# Altium PCB HV_Boost.PcbDoc
Units mil, origin at the board's own origin, x right, y up, seen from the top; angles counter-clockwise.
Board outline 6299.21 x 1771.65 mil, 2 copper layers (Power, GND), stack 21 mil thick; 29 components, 17 nets, 88 pads, 63 vias.
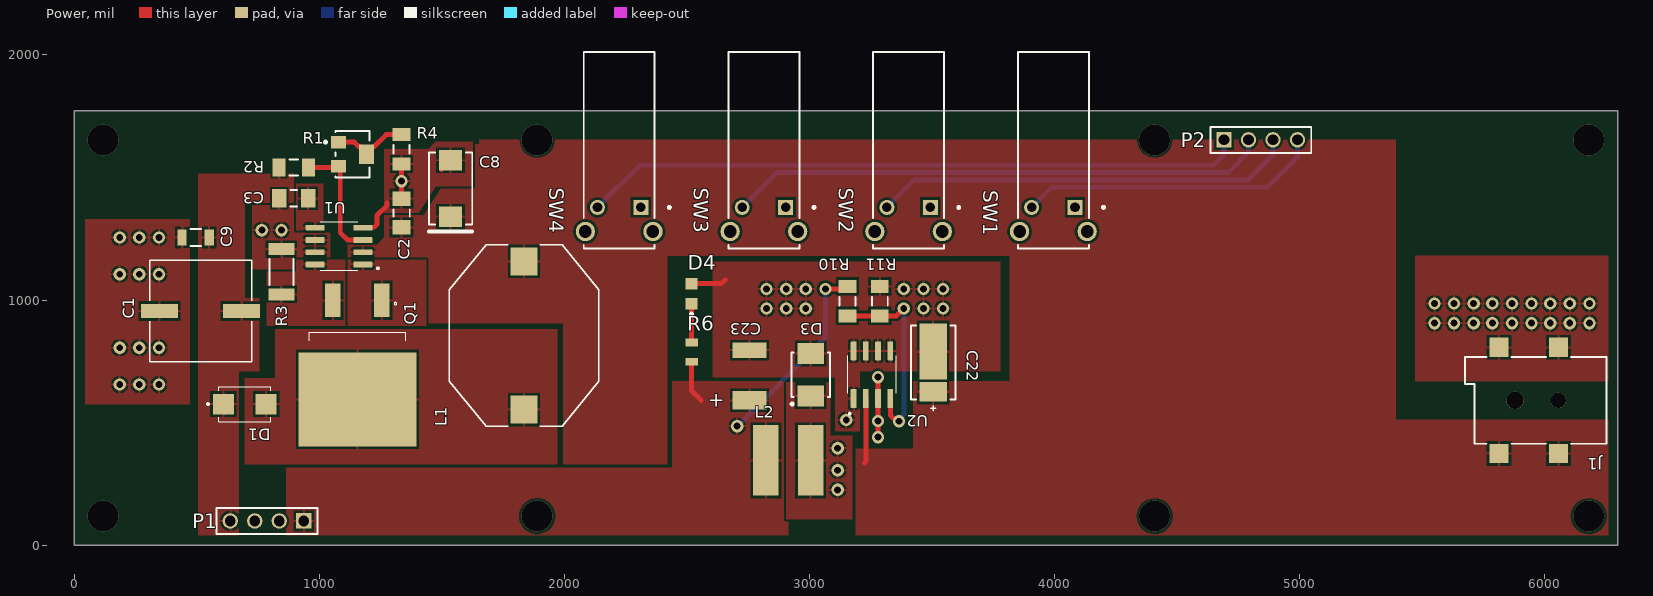
[diagram p0: Power view]
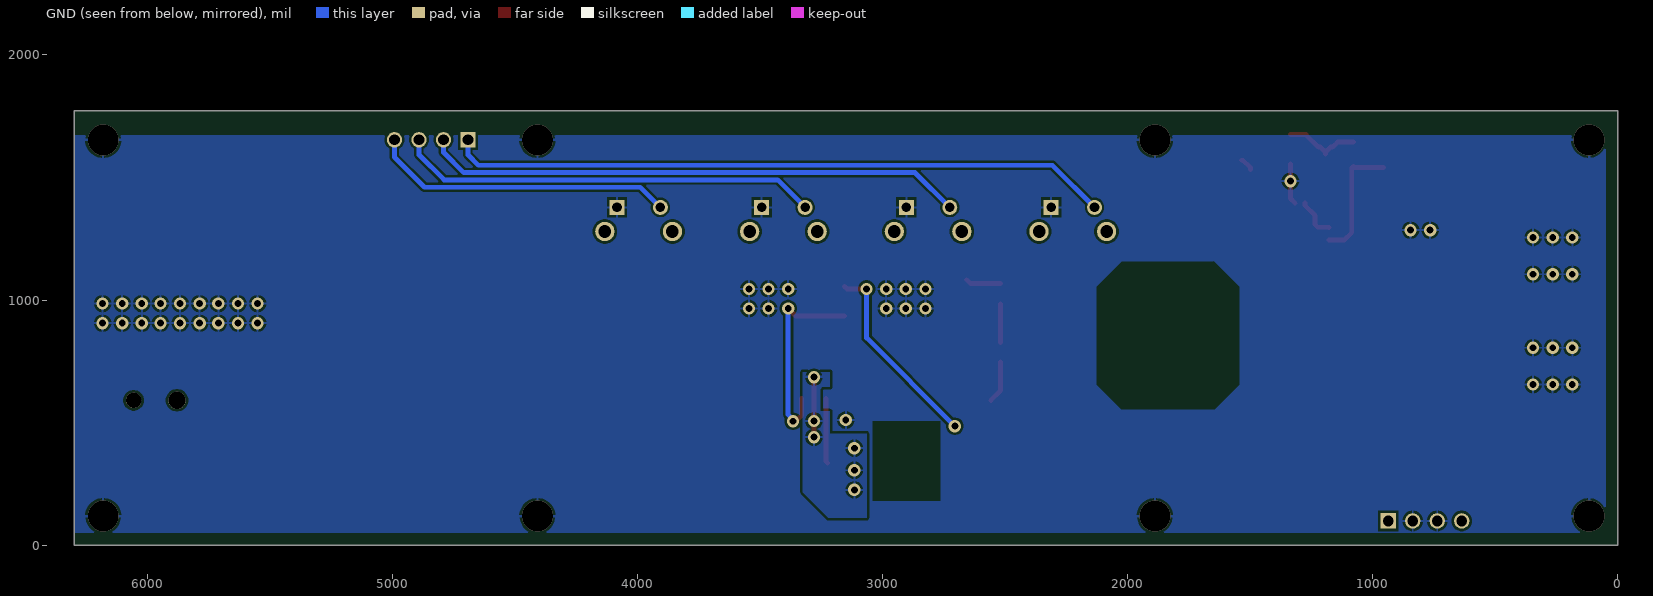
[diagram p1: GND view, seen from below]
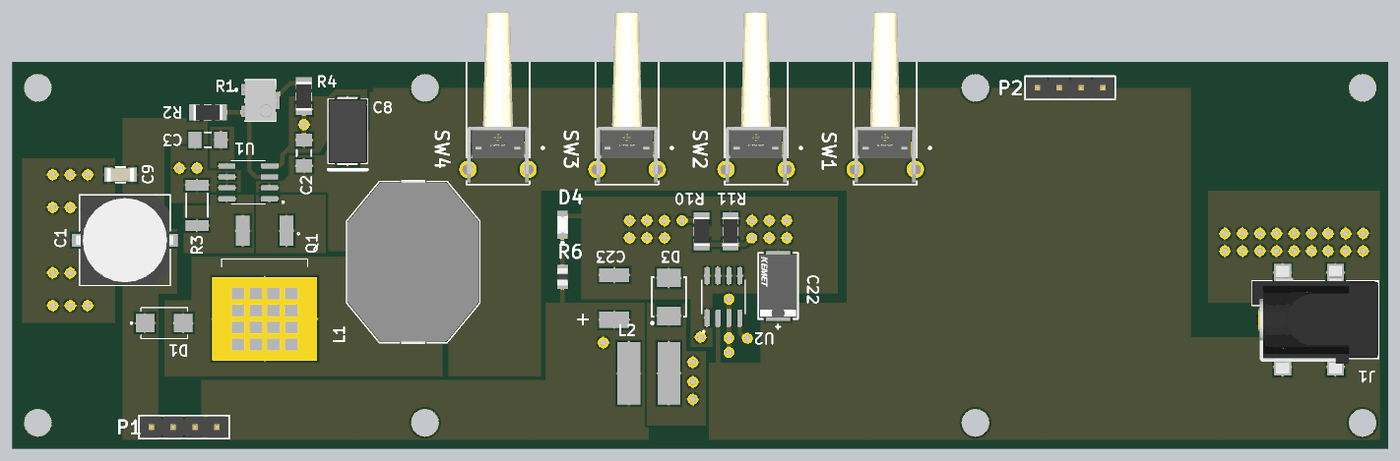
[diagram p2: 3D render of the assembled board from above, using the file's embedded part models]

## Layer stack, top to bottom
Top Solder: solder mask 0.4, Solder Resist, Dk 3.5
Power: signal copper 1.4
Dielectric 2: prepreg 2.8, PP-006, Dk 4.1
Dielectric 1: dielectric 12.6, FR-4, Dk 4.8
Dielectric 3: prepreg 2.8, PP-006, Dk 4.1
GND: signal copper 1.4
Bottom Solder: solder mask 0.4, Solder Resist, Dk 3.5

## Board outline
0,0 6299.21,0 6299.21,1771.65 0,1771.65

## Design rules (kind name [scope] priority, off if disabled: settings)
Clearance [All] p1: gap=10 ignorepadtopadclearanceinfootprint=FALSE except(0: Arc-Hole Track-Hole SMDPad-Hole THPad-Hole Via-Hole Fill-Hole Poly-Hole Region-Hole Text-Hole; 5: Arc-Arc Arc-Track Track-Track SMDPad-SMDPad; 7.87: Arc-SMDPad Arc-THPad Track-SMDPad Track-THPad; 19.68: THPad-THPad)
Height [All] p1: minheight=0 maxheight=1968.5 prefheight=500
HoleSize [All] p1: absolutevalues=TRUE maxlimit=248.03 minlimit=7.87 maxpercent=80.000 minpercent=20.000
PolygonConnect [All] p1: connectstyle=Relief reliefconductorwidth=10 reliefentries=4 polygonreliefangle="90 Angle" airgapwidth=10
RoutingVias [All] p1: holewidth=28 width=50 viastyle="Through Hole" minholewidth=28 minwidth=50 maxholewidth=28 maxwidth=50
SolderMaskExpansion [All] p1: expansion=1.97 istentingtop=FALSE
Width [All] p1: maxlimit=100 minlimit=10 preferedwidth=10
28 further rules are at their usual default settings.

## Classes and differential pairs
component class Buttons: SW1 SW2 SW3 SW4
component class MAX1771: C1 C2 C3 C8 C9 D1 L1 Q1 R1 R2 R3 R4 U1
component class MIC4690YM-TR: C22 C23 D3 D4 L2 L8 R6 R10 R11 U2
component class Connectors: J1 P1 P2

## Components (designator, comment, footprint, x,y, rotation, side; value= is the part's Value field where it differs from the comment)
C1 "EEV-EB2E100Q" CAP_UCD_10X10 516.22,955.12 r180 top
C2 "12065C104KAT2A" CAPC3216X94X50ML20T25 1336.22,1355.12 r90 top
C3 "12065C104KAT2A" CAPC3216X94X50ML20T25 896.22,1415.12 r180 top
C8 "TPSD107K010R0100" AVX-7343-31_L 1536.22,1455.12 r90 top
C9 "C1206C104KARACTU" FP-C1206C-EB-MFG 496.22,1255.12 r180 top value="0.10 μF"
C22 "47uF" FP-T528Z477M2R5ATE008-MFG 3505.91,745.28 r270 top
C23 "595D107X06R3C2T" 595D107X06R3C2T 2755.91,795.28 r180 top
D1 "ES2F" "DIOM5436X244N - duplicate" 696.22,575.12 r0 top
D3 "SS22T3G" ONSC-SMB-2-403A-03_V 3005.91,695.28 r90 top
D4 "LGR971-KN-1" FOOTPRINT-OSRAM-CHIPLED-0805-1A2K 2519.69,1025.59 r90 top
J1 "694106106102" 694106106102 5984.25,590.55 r90 top
L1 "B82479A1104M000" IND_EPCOS_B82479A1 1836.22,855.12 r90 top
L2 "CDRH6D38NP-180NC" CDRH6D38NP-180NC 3005.91,345.28 r180 top
P1 "61300411121" 61300411121 787.4,98.43 r180 top
P2 "61300411121" 61300411121 4842.52,1653.54 r0 top locked
Q1 "IRF740 D2PAK" D2PAK 1156.22,735.12 r270 top
R1 "3214W-1-502E" BOUR-3214W_V 1136.22,1595.12 r0 top
R2 "Resistor 1.5M +/-1% 1206 250 mW" RESC3216X60X45ML15T20 896.22,1541.27 r180 top value=1.5M
R3 "0.05 1% 2010(5025)" RESC2010(5025)_N 846.22,1115.12 r90 top value="100.00 Ohm"
R4 "Resistor 10k +/-1% 1206 250 mW" RESC3216X60X45ML15T20 1336.22,1615.12 r90 top value=10k
R6 "RMCF0805FT1K20" FOOTPRINT-0805-GEN 2519.69,787.4 r270 top value=1.2k
R10 "Resistor 3.01k +/-1% 1206 250 mW" RESC3216X60X45ML15T20 3155.91,995.28 r90 top value=3.01k
R11 "Resistor 976 +/-1% 1206 250 mW" RESC3216X60X45ML15T20 3287.84,995.28 r270 top value=976
SW1 "TL1105QF160Q" FP-TL1105QF160Q-MFG 3996.06,1611.22 r180 top
SW2 "TL1105QF160Q" FP-TL1105QF160Q-MFG 3405.51,1611.22 r180 top
SW3 "TL1105QF160Q" FP-TL1105QF160Q-MFG 2814.96,1611.22 r180 top
SW4 "TL1105QF160Q" FP-TL1105QF160Q-MFG 2224.41,1611.22 r180 top
U1 "MAX1771" 8-SOIC 1081.22,1220.12 r180 top
U2 "MIC4690YM-TR" TPS5402 3255.91,695.28 r90 top

## Footprints (in the part's own frame and the unit in brackets; to place one, negate y for a bottom-side part, rotate by r counter-clockwise, add the part's x,y. Pads: shape width x height; smd on the part's side, far side on the other; paste and mask are expansions set on the pad)
8-SOIC [mm]
  rrect25% 1.97x0.6 smd: 1(-2.47,1.905) 2(-2.47,0.635) 3(-2.47,-0.635) 4(-2.47,-1.905) 5(2.47,-1.905) 6(2.47,-0.635) 7(2.47,0.635) 8(2.47,1.905)
  silkscreen extent -4.14,-2.52 1.95,2.52
595D107X06R3C2T [mm]
  rect 3.5x1.9 smd: 1(0,5.2)
  rect 3.5x1.6 smd: 2(0,0)
  body extent -1.73,-0.79 1.73,6.12, height 3
61300411121 [mm] "Pin Header, pitch 2.54 mm, THT, Vertical, single row, 4p"
  rect 1.6x1.6 hole 1.1: 1(-3.81,0)
  round 1.6 hole 1.1: 2(-1.27,0) 3(1.27,0) 4(3.81,0)
  silkscreen extent -5.23,-1.35 5.23,1.35, body extent -5.08,-1.27 5.08,1.27, height 8.57
694106106102 [mm] "DC Power Jack Right Angled SMT ?6.4 with 4 soldering pads & pegs"
  rect 2x2 smd: 1(-5.5,-1.85) 1(-5.5,4.3) 2(5.5,-1.85) 3(5.5,4.3)
  round 1.6 hole 1.6 unplated: MH1(0,-1.85)
  round 1.8 hole 1.8 unplated: MH2(0,2.65)
  silkscreen extent -4.5,-6.85 4.5,7.85, body extent -6.25,-6.85 6.25,7.85, height 11.05
AVX-7343-31_L [mm] "Molded Capacitor, 2-Leads, Body 7.5x4.5mm, IPC High Density"
  rect 2.1x2.4 smd: 1(-2.925,0) 2(2.925,0)
  silkscreen extent -4.47,-2.25 3.75,2.25, body extent -3.97,-2.25 3.97,2.25, height 3.1
BOUR-3214W_V [mm] "SMD, 3-Leads, Body 3.5x4.8mm, Pitch 1.25mm"
  rect 1.6x1.3 smd paste+0: 1(-1.45,1.25) 3(-1.45,-1.25)
  rect 1.6x2 smd paste+0: 2(1.45,0)
  silkscreen extent -2.92,-2.4 1.75,2.4, body extent -1.98,-2.41 1.98,2.41, height 5.28
CAP_UCD_10X10 [mil]
  rect 150x59 smd paste+0 mask+0: 1(-167.5,0) 2(167.5,0)
  silkscreen extent -208,-208 208,208, body extent -222,-203 222,203, height 415
CAPC3216X94X50ML20T25 [mm] "Chip Capacitor, 2-Leads, Body 3.20x1.60mm, IPC Low Density"
  rect 1.5x1.9 smd: 1(-1.5,0) 2(1.5,0)
  silkscreen extent -0.35,-0.85 0.35,0.85, body extent -1.7,-0.9 1.7,0.9, height 0.94
CDRH6D38NP-180NC [mm]
  rect 2.65x7.3 smd: 1(0,0) 2(4.65,0)
  body extent -1.3,-3.63 5.94,3.63, height 4
D2PAK [mm]
  rect 3.5x1.6 smd: 1(-6.7,2.54) 3(-6.7,-2.54)
  rect 9.75x12.2 smd paste-7: 4(3.575,0)
  silkscreen extent -6.48,-5 -2.51,5
"DIOM5436X244N - duplicate" [mm]
  rect 2.18x2.12 smd: 1(-2.215,0) 2(2.215,0)
  silkscreen extent -3.9,-1.81 2.7,1.81
FOOTPRINT-0805-GEN [mm] "1/8 Watt"
  rect 0.8x1.3 smd: 1(-1,0) 2(1,0)
  body extent -1,-0.6 1,0.6, height 0.71
FOOTPRINT-OSRAM-CHIPLED-0805-1A2K [mm] "Rectangle with Flat Top 1.30mm x 1.25mm"
  rect 1.2x1.2 smd: 1(-1.05,0) 2(1.05,0)
  silkscreen extent -2.1,0 -2.1,0, body extent -1.01,-0.62 0.99,0.63, height 0.8
FP-C1206C-EB-MFG [mm]
  rect 0.95x1.7 smd paste+0 mask+0: 1(-1.4,0) 2(1.4,0)
  silkscreen extent -0.55,-0.9 0.55,0.9, body extent -2,-1 2,1, height 0.25
FP-T528Z477M2R5ATE008-MFG [mm]
  rect 5.82x2.82 smd paste+0 mask+0: 1(-1.15,0)
  rect 2.02x2.82 smd paste+0 mask+0: 2(3.05,0)
  silkscreen extent -3.85,-2.3 5,2.3, body extent -4.18,-2.42 4.18,2.42, height 0.25
FP-TL1105QF160Q-MFG [mm]
  rect 1.55x1.55 hole 1 paste-1000 mask+0: 1(-2.25,5.925)
  round 1.55 hole 1 paste-1000 mask+0: 2(2.25,5.925)
  round 2 hole 1.3 paste-1000 mask+0: 3(-3.5,8.425) 4(3.5,8.425)
  silkscreen extent -5.33,-10.18 3.67,10.18, body extent -4.6,-10.28 4.6,10.28, height 0.25
IND_EPCOS_B82479A1 [mil]
  rect 115x110 smd paste+0 mask+0: 1(-302.5,0) 2(302.5,0)
  silkscreen extent -370,-305 370,305, body extent -377,-300 377,300, height 292
ONSC-SMB-2-403A-03_V [mil] "Molded, 2-Leads, Body 4.6x3.95mm"
  rect 85x107.99 smd: 1(-87.01,0) 2(87.01,0)
  silkscreen extent -125,-79 91,81, body extent -91,-78 91,78, height 97
RESC2010(5025)_N [mm] "Chip Resistor, Body 5.0x2.5mm, IPC Medium Density"
  rect 1.25x2.7 smd: 1(-2.35,0) 2(2.35,0)
  silkscreen extent -1.35,-1.25 1.35,1.25, body extent -2.6,-1.35 2.6,1.35, height 0.71
RESC3216X60X45ML15T20 [mm] "Chip Resistor, 2-Leads, Body 3.3x1.75mm, IPC Low Density"
  rect 1.35x1.85 smd: 1(-1.525,0) 2(1.525,0)
  silkscreen extent -0.45,-0.82 0.45,0.82, body extent -1.65,-0.87 1.65,0.87, height 0.6
TPS5402 [mm]
  rrect25% 1.97x0.6 smd: 1(-2.47,1.905) 2(-2.47,0.635) 3(-2.47,-0.635) 4(-2.47,-1.905) 5(2.47,-1.905) 6(2.47,-0.635) 7(2.47,0.635) 8(2.47,1.905)
  silkscreen extent -4.14,-2.52 1.95,2.52

## Part data
C1: library part UUB2E4R7MNL1GS, Built_By=EMA_Cory, Copyright="Copyright (C) 2018 Accelerated Designs. All rights reserved", Manufacturer_Part_Number=UUB2E4R7MNL1GS, RefDes=RefDes, SourceLibrary=Nichicon_2019-09-13, Type=DEV, Vendor=Nichicon
C2 C3: library part CMP-2000-05018-1, "Chip Capacitor, Ceramic, 100 nF, 10%, 50 V, 1206, RoHS, Tape and Reel / 12065C104KAT2A", Capacitance=100nF, Case Size/Dimension=1206, Dielectric=X7R, Manufacturer=AVX, Rated Voltage=50V, Tolerance (%)=±10%, Datasheet URL=http://www.mouser.com/ds/2/40/cauto-360.pdf, Datasheet Version=Sep-14, Manufacturer URL=http://www.avx.com/
C8: library part CMP-2000-07298-1, "Tantalum Capacitor, 100 uF, +/- 10%, 10 V, -55 to 125 degC, 2917 (7343 Metric), RoHS, Tape and Reel / TPSD107K010R0100", Capacitance=100µF, ESR (Equivalent Series Resistance)=100mOhm, Lifetime @ Temp.=-, Manufacturer=AVX, Manufacturer Size Code=D, Operating Temperature=-55°C~125°C, Package / Case=2917(7343Metric), Package Description="2-Pin Surface Mount Device, Body 7.3 x 4.35 mm", Package Reference=7343-31, Standard Package=1, Tolerance=±10%, Voltage - Rated=10V, Catalog Drawings=TPSSeriesSides, Category=Capacitors, Datasheet URL=http://datasheets.avx.com/TPS.pdf, Datasheet Version=01/2017, Family=TantalumCapacitors, Featured Product=TPSCapacitors, Features=GeneralPurpose, Height - Seated (Max)="0.122\"(3.10mm)", Lead Spacing=-, Manufacturer URL=http://www.avx.com/, Mounting Technology=SurfaceMount, Mounting Type=SurfaceMount, Online Catalog=TPSSeries, Other Names=478-1777-1, Packaging=CutTape(CT), Product Training Modules=ComponentSolutionsforSmartMeterApplications, Series=TPS, Size / Dimension="0.287\"Lx0.169\"W(7.30mmx4.30mm)", Type=Molded
C9: library part CMP-1037-04229-2, "CAP CER 0.1UF 250V X7R 1206 / C1206C104KARACTU", Capacitance="0.10 μF", Manufacturer=KEMET, Package=C1206C-EB, Temperature="-55°C to +150°C", Temperature Characteristic=X7R, Temperature Coefficient=15%, Temperature Range High=+150°C, Temperature Range Low=-55°C, Tolerance=0.1, Voltage Rating="250 V", Automotive=Yes, Automotive Grade="Grade 0", Category=Cap, ComponentLink2Description=Datasheet, ComponentLink2URL=https://content.kemet.com/datasheets/KEM_C1007_X8R_ULTRA_150C_SMD.pdf, Device Class L1="Passive Components", Device Class L2=Capacitors, Device Class L3="Ceramic Capacitors", Digikey Description="CAP CER 0.1UF 250V X7R 1206", Height=0.88mm, Ipc Land Pattern Name=CAPC320160X78, Lead Free=Yes, Manufacturer Part Number=C1206C104KARACTU, Material=Ceramic, Mouser Description="Multilayer Ceramic Capacitors MLCC - SMD/SMT 250volts 0.1uF X7R 10%", Octopart=https://octopart.com/c1206c104karactu-kemet-193627, RoHS=TRUE
C22: library part CMP-03017-000005-1, "CAP TANT 47UF 20% 20V 2917 / 595D476X0020D2T", Capacitance=470uF, Case Code (Imperial)=2917, Case Code (Metric)=7343, ESR (Equivalent Series Resistance)=8mR, Leakage Current=118uA, Max Operating Temperature=105°C, Min Operating Temperature=-55°C, Package Quantity=1, Ripple Current=6.4A, Tolerance=20%, Voltage Rating=2.5V, Case/Package=2917, Construction=Flat, Depth=4.3mm, Dissipation Factor=10%, Features="General Purpose", Height=1.7mm, Height - Seated (Max)=0.067inch, Length=7.3mm, Mount="Surface Mount", Packaging="Tape and Reel", Polarity=Polar, REACH SVHC="No SVHC", RoHS Compliant=Yes, Series="KO-CAP T528", Termination=SMD/SMT, Voltage Rating (DC)=2.5V, Width=0.169inch
C23: "595D107X06R3C2T / 100uF, 6.3V"
D1: library part ES2F_1
D3: library part CMP-1055-00373-1, "Schottky Power Rectifier, 2-Pin SMB, Pb-Free, Tape and Reel", Manufacturer="On Semiconductor", ComponentLink1Description="Manufacturer URL", ComponentLink1URL=http://www.onsemi.com/, ComponentLink2Description=Datasheet, ComponentLink2URL=http://www.onsemi.cn/pub_link/Collateral/SS24-D.PDF, ComponentLink3Description="Package Specification", ComponentLink3URL=http://www.onsemi.com/pub_link/Collateral/403A-03.PDF, Configuration=Single, DatasheetVersion="Rev. 4", IFSM Max (A)=75, Mounting Technology="Surface Mount", PackageDescription="2-Pin Small Molded Package, J-Bend Lead, Body 4.33 x 3.625 mm", PackageReference=SMB-2-403A-03, PackageVersion="Rev. J, 07/2012", Packing="Tape and Reel", PartNumber=SS22T3G, RoHS=TRUE
D4: library part CMP-017-000003-2, "LED Uni-Color Green 572nm 2-Pin Chip 0805(2012Metric) T/R", Current - Maximum=25mA, Current - Test=20mA, Forward Voltage=2.2V, Part Number=475-1410-1-ND, Design Item ID=LED-OSRAM-LG-R971-KN-1, Source=Discrete.SchLib
J1: library part CMP-1502-00177-1, "DC Power Jack Connector with 4 soldering pads & Pegs WR-DC, Male, Right Angled, SMT, 5 A, 24 V", Manufacturer="Wurth Elektronik", Operating Temperature=-40to85degC, Rated Current=5A, Working Voltage=24V, Datasheet URL=http://katalog.we-online.de/em/datasheet/6941xx106102.pdf, Gender=Male, Manufacturer URL=http://www.we-online.de, Mounting Technology=SMT, Opening Diameter=6.4mm, Orientation=RightAngled, Package Reference=694106106102, Packaging=TapeandReel, Part Number=694106106102, Plug Inner Diameter=2.05mm, Plug Outer Diameter=5.5mm, Publisher=WurthElektronik
L1: "No Description Available", Built_By=EMA_UL_Team, Copyright="Copyright (C) 2021 Accelerated Designs. All rights reserved", Manufacturer_Part_Number=B82479A1104M000, RefDes=RefDes, SourceLibrary=Epcos_2010-01-01_Inductors, Type=DEV, Vendor=Epcos
P1 P2: library part CMP-1502-01064-1, "THT Vertical Pin Header WR-PHD, Pitch 2.54 mm, Single Row, 4 pins", Contact Resistance=20mOhm, Manufacturer="Wurth Elektronik", Operating Temperature=-40to105degC, Rated Current=3A, Withstanding Voltage=500VAC, Working Voltage=250VAC, Datasheet URL=https://katalog.we-online.de/em/datasheet/6130xx11121.pdf, Gender=Male, Manufacturer URL=http://www.we-online.de, Mounting Technology=THT, Orientation=Vertical, Package Reference=61300411121, Packaging=Bag, Part Number=61300411121, Pin Number=4, Pitch=2.54mm, Publisher=WurthElektronik, Row Number=Single
R1: library part CMP-2000-05579-1, "3214 - 5-Turn Trimpot(R) Trimming Potentiometer, 5 KOhm, +/- 10%, 0.25 W, -65 to 150 degC, RoHS, Tape and Reel", Manufacturer=Bourns, Package Description="3-Pin Surface Mount Device, Body 3.5 x 4.8 mm, Pitch 1.25 mm", Package Reference=3214W, Power Rating=250mW, Resistance Tolerance=±10%, Temperature Coefficient=±100ppm/°C, Track Resistance=5kohm, Datasheet URL=http://www.bourns.com/docs/Product-Datasheets/3214.pdf, Datasheet Version=05/2016, Manufacturer URL=http://www.bourns.com/, Mounting Technology=SurfaceMount, No. of Turns=5, Potentiometer Mounting=SMD, RoHS Compliant=Yes, SVHC=NoSVHC(16-Jun-2014)
R2: library part CMP-009-00016-4, "Chip Resistor, 1.5M Ohm, +/- 1%, 0.25 W, -55 to 155 degC, 1206 (3216 Metric)", Case/Package=1206, Max Operating Temperature=155°C, Min Operating Temperature=-55°C, Power=250mW, Tolerance=1%, Voltage Rating=200V, Mounting Technology=SM, Pins=2, RoHS Compliant=True
R3: library part CMP-1017-00397-1, "0.05.75W 1% 2010 (5025 Metric)  SMD /  LR2010-R05FW", Case-EIA=2010, Case-Metric=5025, Power="0.75 W", Tolerance="1 %", Technology=SMT
R4: library part CMP-009-00016-4, "Chip Resistor, 10 KOhm, +/- 1%, 0.25 W, -55 to 155 degC, 1206 (3216 Metric)", Case/Package=1206, Max Operating Temperature=155°C, Min Operating Temperature=-55°C, Power=250mW, Tolerance=1%, Voltage Rating=200V, Mounting Technology=SM, Pins=2, RoHS Compliant=True
R6: library part CMP-009-00185-2, "Res Thick Film 0805 1.2K Ohm 1% 0.125W ±100ppm/°C Molded SMD Paper T/R", Design Item ID=Resistor-Generic-0805-2012, Source=Generic.SchLib, Type=Resistor
R10: library part CMP-009-00016-4, "Chip Resistor, 3.01KOhm, +/- 1%, 0.25 W, -55 to 155 degC, 1206 (3216 Metric)", Case/Package=1206, Max Operating Temperature=155°C, Min Operating Temperature=-55°C, Power=250mW, Tolerance=1%, Voltage Rating=200V, Mounting Technology=SM, Pins=2, RoHS Compliant=True
R11: library part CMP-009-00016-4, "Chip Resistor, 976Ohm, +/- 1%, 0.25 W, -55 to 155 degC, 1206 (3216 Metric)", Case/Package=1206, Max Operating Temperature=155°C, Min Operating Temperature=-55°C, Power=250mW, Tolerance=1%, Voltage Rating=200V, Mounting Technology=SM, Pins=2, RoHS Compliant=True
SW1 SW2 SW3 SW4: library part CMP-17879-000001-1, "SWITCH TACTILE SPST-NO 0.05A 12V", Contact Current Rating=50mA, Contact Resistance=100mΩ, Manufacturer=E-Switch, Operating Force=160gf, Voltage Rating Dc=12V, Automotive=No, Category=Switch, ComponentLink2Description=Datasheet, ComponentLink2URL=http://spec_sheets.e-switch.com/specs/P010022.pdf, Device Class L1=Electromechanical, Device Class L2=Switches, Device Class L3="Tactile Switches", Digikey Description="SWITCH TACTILE SPST-NO 0.05A 12V", Electromechanical Life=100000Cycles, Height=7.55mm, Lead Free=Yes, Manufacturer Part Number=TL1105QF160Q, Mount="Through Hole", Mouser Description="TL1105 Series SPST 1.6 N Round Button Right Angle Through Hole Tactile Switch", Octopart=https://octopart.com/tl1105qf160q-e-switch-1057556, Package=TL1105QF160Q, RoHS=TRUE, Throw Configuration=SPST

## Via types
v1: diameter 50, hole 28, Power to GND, 55 vias
v2: diameter 125.98, hole 125.89, Power to GND, 8 vias

## Nets (pads, with @x,y where several pads share a name; then routed paths per layer and width w, separated by ;. In a path a pad name is that pad's centre, name@x,y a point inside that pad or via, vN(x,y) a via of type N, cw(c..) or ccw(c..) an arc to the next point about the centre after c; other vN are vias at no path point)
+5V: C23.1 L2.2 P1.1 R6.2 R10.2 | length 977.1
  Power w20: R6.2 2519.69,629.92 2559.06,590.55 ; v1(3065.91,1045.28) 3145.87,1045.28 R10.2
  GND w20: v1(2705.91,485.28) 3065.91,845.28 v1(3065.91,1045.28)
+12V: C2.1 C8.1 C22.2 J1.1 L1.2 U1.2 U2.2 | length 264.8
  Power w20: 3225.91,335.28 3230.91,340.28 U2.2
GND: C1.2 C2.2 C3.2 C8.2 C9.2 C22.1 C23.2 D3.2 D4.2 J1.2 J1.3 P1.2 P1.3 R3.2 R4.1 R11.1 SW1.1 SW2.1 SW3.1 SW4.1 U1.4 U1.6 U1.7 U2.1 U2.5 U2.6 U2.7 U2.8 | length 534.9
  Power w20: U1.4 1180.23,1296.88 1224.5,1296.88 1236.22,1308.6 1236.22,1345.12 1276.22,1385.12 1276.22,1395.12 ; C2.2@1317.02,1394.97 C2.2 v1(1336.22,1485.12) R4.1 ; C8.2@1498.98,1533.03 1498.98,1538.94 1530.31,1570.28 C8.2 ; D4.2 2641.73,1066.93 2657.48,1082.68
  other v1: 3150.91,510.28 186.22,655.12 266.22,655.12 346.22,655.12 186.22,805.12 266.22,805.12 346.22,805.12 5551.18,905.51 5631.18,905.51 5711.18,905.51 5787.4,905.51 5867.4,905.51 5947.4,905.51 6023.62,905.51 6103.62,905.51 6183.62,905.51 2825.91,965.28 2905.91,965.28 2985.91,965.28 3465.91,965.28 3545.91,965.28 5551.18,985.51 5631.18,985.51 5711.18,985.51 5787.4,985.51 5867.4,985.51 5947.4,985.51 6023.62,985.51 6103.62,985.51 6183.62,985.51 2825.91,1045.28 2905.91,1045.28 2985.91,1045.28 3385.91,1045.28 3465.91,1045.28 3545.91,1045.28 186.22,1105.12 266.22,1105.12 346.22,1105.12 186.22,1255.12 266.22,1255.12 346.22,1255.12 766.22,1285.12 846.22,1285.12
  other v2: 118.11,118.11 1889.76,118.11 4409.45,118.11 6181.1,118.11 118.11,1653.54 1889.76,1653.54 4409.45,1653.54 6181.1,1653.54
HV+: C1.1 C9.1 D1.1 P1.4 R2.2
NetC3_1: C3.1 U1.5
NetD1_2: D1.2 L1.1 Q1.4
NetD3_1: D3.1 L2.1 U2.3 | length 245
  Power w20: v1(3280.91,440.28) v1(3280.91,506.44) v1(3280.91,685.28)
  other v1: 3115.91,225.28 3115.91,305.28 3115.91,395.28
NetD4_1: D4.1 R6.1 | length 157.5
  Power w20: R6.1 D4.1
NetP2_1: P2.1 SW4.2 | length 2706.6
  GND w20: SW4.2 2307.87,1550 4650,1550 4692.52,1592.52 P2.1
NetP2_2: P2.2 SW3.2 | length 2210.2
  GND w20: SW3.2 2868.43,1520 4710,1520 4792.52,1602.52 P2.2
NetP2_3: P2.3 SW2.2 | length 1725.5
  GND w20: SW2.2 3428.98,1490 4790,1490 4892.52,1592.52 P2.3
NetP2_4: P2.4 SW1.2 | length 1240.8
  GND w20: SW1.2 3989.53,1460 4870,1460 4992.52,1582.52 P2.4
NetQ1_1: Q1.1 U1.1
NetQ1_3: Q1.3 R3.1 U1.8
NetR1_1: R1.1 R1.2 R4.2 | length 312
  Power w20: R1.1 1144.09,1644.33 1163.94,1624.49 1171.81,1624.49 R1.2@1193.31,1602.99 ; R1.2 R1.2@1193.31,1602.99 ; R4.2 1273.35,1675.16 1222.68,1624.49 1214.8,1624.49 R1.2@1193.31,1602.99
NetR1_3: R1.3 R2.1 U1.3 | length 503.2
  Power w20: R2.1 1074.5,1541.27 R1.3 1086.22,1538.82 1086.22,1275.12 1116.22,1245.12 U1.3
NetR10_1: R10.1 R11.2 U2.4 | length 824.1
  Power w20: R10.1 R11.2 3355.87,935.24 v1(3385.91,965.28) ; U2.4 3330.91,529.87 3349.76,511.02 3360.17,511.02 v1(3365.91,505.28)
  GND w20: v1(3365.91,505.28) 3365.91,511.99 3385.91,531.99 v1(3385.91,965.28)
pads on no net: J1.MH1 J1.MH2 SW1.3 SW1.4 SW2.3 SW2.4 SW3.3 SW3.4 SW4.3 SW4.4

## Polygon pours and split planes (outlines as drawn)
+12V on Power "Power-+12V" (solid, pour order 58): 1116.22,1165.12 1446.22,1165.12 1446.22,905.12 1996.22,905.12 1996.22,330.12 2421.22,330.12 2421.22,1181.1 3818.9,1181.1 3818.9,669.29 3425.2,669.29 3425.2,393.7 3188.98,393.7 3188.98,39.37 6259.84,39.37 6259.84,511.81 5393.7,511.81 5393.7,1653.54 1653.54,1653.54 1653.54,1635.12 1636.22,1635.12 1636.22,1455.12 1496.22,1455.12 1426.22,1345.12 1266.22,1345.12 1266.22,1255.12 1236.22,1225.12 1116.22,1225.12
GND on Power "GND" (solid, pour order 56): 6259.84,669.29 6259.84,1181.1 5472.44,1181.1 5472.44,669.29
+5V on Power "GND" (solid, pour order 55): 866.14,39.37 2913.39,39.37 2913.39,669.29 2440.94,669.29 2440.94,314.96 866.14,314.96
GND on Power "Power-GND" (solid, pour order 46): 2605.91,1155.28 2605.91,685.28 3105.91,685.28 3105.91,465.28 3205.91,465.28 3205.91,710.28 3779.53,710.28 3779.53,855.28 3779.53,1155.28
NetD3_1 on Power "Power-NetD3_1" (solid, pour order 49): 3085.91,665.28 2905.91,665.28 2905.91,105.28 3175.91,105.28 3175.91,445.28 3085.91,445.28
NetD1_2 on Power "GND" (solid, pour order 31): 1971.22,880.12 1971.22,330.12 696.22,330.12 696.22,680.12 821.22,680.12 821.22,880.12
HV+ on Power "GND" (solid, pour order 32): 671.22,39.37 506.22,39.37 506.22,1276.69 506.22,1515.75 896.22,1515.75 896.22,1396.69 696.22,1396.69 696.22,1006.69 756.22,1006.69 756.22,708.66 671.22,708.66
GND on Power "GND" (solid, pour order 33): 471.22,1330.12 471.22,575.12 46.22,575.12 46.22,1330.12
NetQ1_3 on Power "GND" (solid, pour order 34): 906.22,1165.12 1106.22,1165.12 1106.22,895.12 786.22,895.12 786.22,1115.12 906.22,1115.12
NetQ1_1 on Power "GND" (solid, pour order 35): 1116.22,1165.12 1436.22,1165.12 1436.22,895.12 1116.22,895.12
GND on Power "GND" (solid, pour order 36): 726.22,1125.12 896.22,1125.12 896.22,1175.12 1046.22,1175.12 1046.22,1275.12 896.22,1275.12 896.22,1465.12 726.22,1465.12
NetC3_1 on Power "GND" (solid, pour order 37): 906.22,1285.12 1016.22,1285.12 1016.22,1475.12 906.22,1475.12
GND on Power "GND" (solid, pour order 44): 1266.22,1355.12 1266.22,1615.12 1446.22,1615.12 1476.22,1645.12 1626.22,1645.12 1626.22,1465.12 1476.22,1465.12 1406.22,1355.12
GND on GND "GND" (solid, pour order 54): 50,50 50,1673.23 6300,1673.23 6300,50
NetD3_1 on GND "GND" (solid, pour order 47): 3325.91,705.28 3215.91,705.28 3215.91,645.28 3245.91,645.28 3255.91,635.28 3255.91,545.28 3215.91,545.28 3215.91,455.28 3095.91,455.28 3065.91,455.28 3065.91,111.18 3221.81,111.18 3325.91,215.28

## Other copper
GND:
  pour cut-out: 3040.91,180.28 3040.91,505.28 2765.91,505.28 2765.91,180.28
  pour cut-out: 1546.22,655.12 1646.22,555.12 2026.21,555.12 2027.02,554.3 2127.02,654.3 2127.02,1054.3 2024.52,1156.8 1649.54,1156.8 1648.72,1157.62 1546.22,1055.12

## Text inside footprints (layer, text, board x,y; h text height)
C23: Top Overlay "+" at 2655.91,615.27 h60 r180